# Altium PCB heartbeatPCB.PcbDoc
Units mil, origin at the board's own origin, x right, y up, seen from the top; angles counter-clockwise.
Board outline 3937.01 x 1151.1 mil, 2 copper layers (Top Layer, Bottom Layer); 36 components, 21 nets, 97 pads, 8 vias.
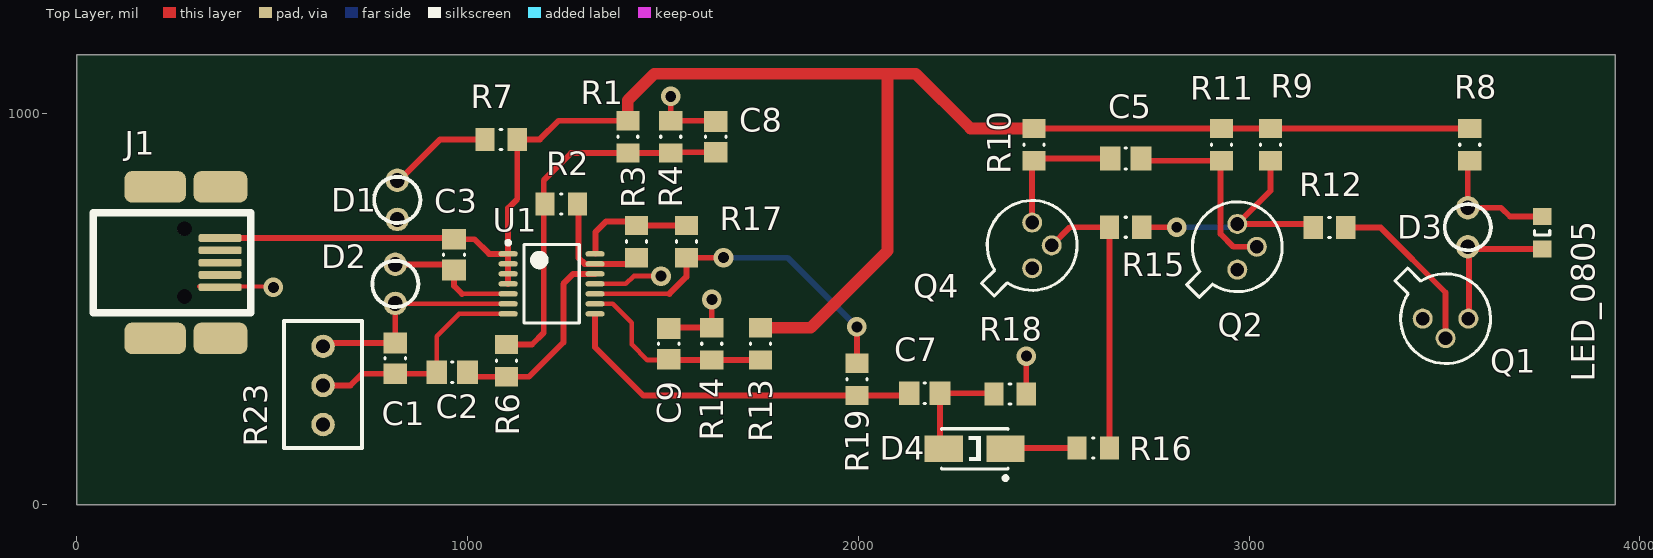
[diagram p0: Top Layer view]
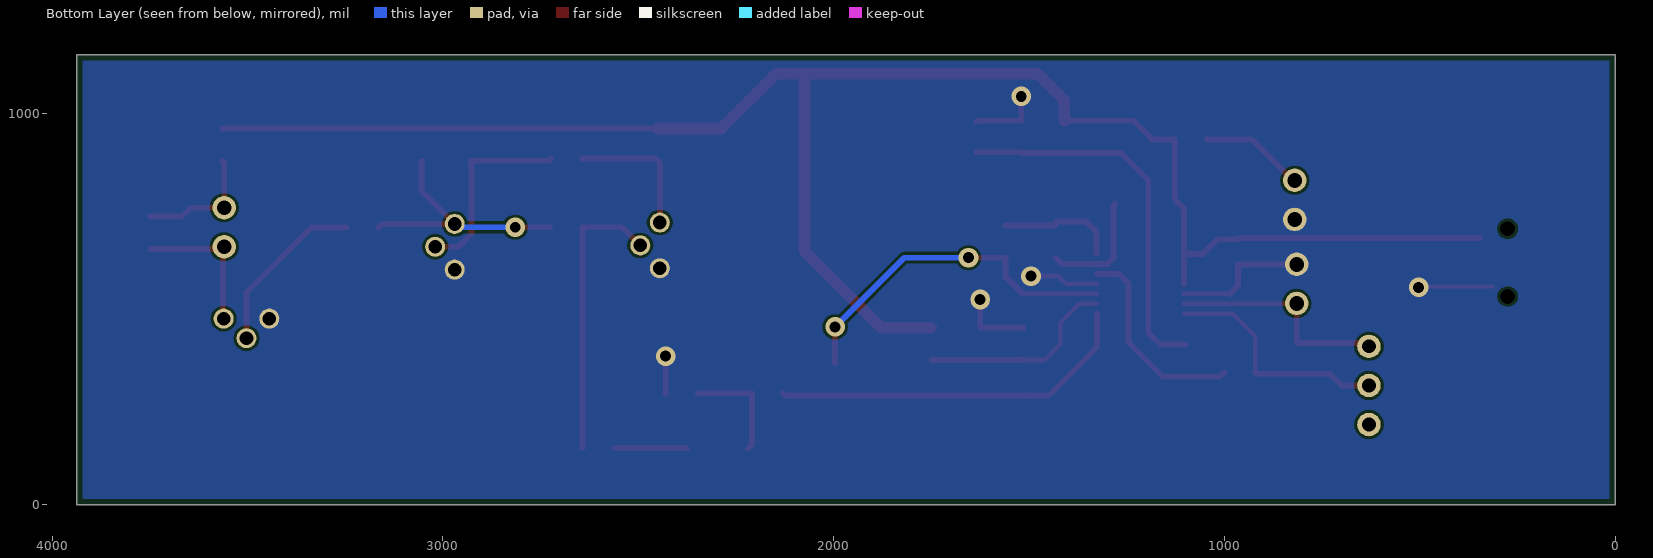
[diagram p1: Bottom Layer view, seen from below]

## Layer stack, top to bottom
Top Solder: solder mask 0.4, Solder Resist, Dk 3.5
Top Layer: signal copper 1.4
Dielectric 1: dielectric 12.6, FR-4, Dk 4.8
Bottom Layer: signal copper 1.4
Bottom Solder: solder mask 0.4, Solder Resist, Dk 3.5

## Board outline
0,0 3937.01,0 3937.01,1151.1 0,1151.1

## Design rules (kind name [scope] priority, off if disabled: settings)
AcuteAngle [All] p1: minimum=6.00000000000000E+0001 checktracksonly=FALSE
BoardOutlineClearance [All] p1: gap=15
Clearance [All] p1: gap=7
PolygonConnect [All] p1: connectstyle=Direct reliefconductorwidth=10 reliefentries=4 polygonreliefangle="90 Angle" airgapwidth=10
RoutingVias [All] p1: holewidth=28 width=50 viastyle="Through Hole" minholewidth=28 minwidth=50 maxholewidth=28 maxwidth=50
SolderMaskExpansion [All] p1: expansion=4
Width [InNet('5V')] p1: maxlimit=80 minlimit=10 preferedwidth=30
30 further rules are at their usual default settings.

## Classes and differential pairs
component class Sheet2: C5 C7 C9 D3 D4 LED_0805 Q1 Q2 Q4 R8 R9 R10 R11 R12 R13 R14 R15 R16 R17 R18 R19
component class Sheet1: C1 C2 C3 C8 D1 D2 J1 R1 R2 R3 R4 R6 R7 R23 U1

## Components (designator, comment, footprint, x,y, rotation, side; value= is the part's Value field where it differs from the comment)
C1 "50 nF" CAPC0805(2012)75_M 815,374.37 r90 top
C2 "2 uF" CAPC0805(2012)75_M 960.63,338.94 r180 top
C3 "CAP 0.5pF 50V 0805(2012)" CAPC0805(2012)75_M 965,640 r90 top
C5 "2 uF" CAPC0805(2012)75_M 2684.37,885.91 r180 top
C7 "2 uF" CAPC0805(2012)75_M 2169.69,285 r0 top
C8 "CAP 0.5pF 50V 0805(2012)" CAPC0805(2012)75_M 1635,941.34 r270 top
C9 "CAP 0.5pF 50V 0805(2012)" CAPC0805(2012)75_M 1514.97,411.63 r270 top
D1 "photodiode" 3mm_diode 820,830 r270 top
D2 "photodiode" 3mm_diode 815,615 r270 top
D3 "5mm_LED" 3mm_diode 3560,760 r270 top
D4 "" DIOD-S1M-13-F-SMA-2_V 2298,143 r0 top
J1 "67503-1020" MOLX-67503-1020_V 366.53,682.38 r0 top
LED_0805 "150080BS75000" 0805_A 3750,695.88 r90 top
Q1 "2N2222" MLTC-TO-18-3 3503,476 r0 top
Q2 "2N2222" MLTC-TO-18-3 2970,660 r90 top
Q4 "2N2222" MLTC-TO-18-3 2445,663.46 r90 top
R1 "? oHm" RESC0805(2012)_M 1410,941.34 r90 top
R2 "? Ohm" RESC0805(2012)_M 1239.66,769 r0 top
R3 "? Ohm" RESC0805(2012)_M 1432,673.34 r90 top
R4 "? Ohm" RESC0805(2012)_M 1520,941.34 r270 top
R6 "? Ohm" RESC0805(2012)_M 1100,368.66 r90 top
R7 "4R3 5% 0805(2012)" RESC0805(2012)_M 1085.63,935 r0 top
R8 "? Ohm" RESC0805(2012)_M 3565,921.34 r270 top
R9 "? Ohm" RESC0805(2012)_M 3055,921.34 r270 top
R10 "? Ohm" RESC0805(2012)_M 2450,921.34 r270 top
R11 "? Ohm" RESC0805(2012)_M 2930,921.34 r270 top
R12 "? Ohm" RESC0805(2012)_M 3206,709 r0 top
R13 "? Ohm" RESC0805(2012)_M 1749.97,411.63 r90 top
R14 "? Ohm" RESC0805(2012)_M 1624.97,411.63 r90 top
R15 "? Ohm" RESC0805(2012)_M 2684.37,710 r0 top
R16 "? Ohm" RESC0805(2012)_M 2601.34,145 r0 top
R17 "? Ohm" RESC0805(2012)_M 1560,673.34 r90 top
R18 "" RESC0805(2012)_M 2388.35,283.03 r0 top
R19 "? Ohm" RESC0805(2012)_M 1996.22,320.43 r90 top
R23 "5Mohm Potentiometer" 5k_pot 630,405 r270 top
U1 "ADA4891-3ARUZ-R7" ADI-RU-14_L 1215,565 r0 top

## Footprints (in the part's own frame and the unit in brackets; to place one, negate y for a bottom-side part, rotate by r counter-clockwise, add the part's x,y. Pads: shape width x height; smd on the part's side, far side on the other; paste and mask are expansions set on the pad)
3mm_diode [mil]
  round 60 hole 38: 1(0,0) 2(100,0)
  silkscreen extent -9,-59 109,59
5k_pot [mil] "3296W-1-505LF"
  round 60 hole 35: 1(0,0) 2(100,0) 3(200,0)
  silkscreen extent -65,-100 260,100
0805_A [mm] "Chip LED, 2-Leads, Body 2.0x1.3mm, IPC Medium Density"
  rect 1.1x1.2 smd: 1(-1.05,0) 2(1.05,0)
  silkscreen extent -0.15,-0.5 0.15,0.5, body extent -1,-0.62 1,0.63, height 0.68
ADI-RU-14_L [mm] "SOP, 14-Leads, Body 5x4.4mm, Pitch 0.65mm, IPC High Density"
  oval 1.25x0.35 smd: 1(-2.825,1.95) 2(-2.825,1.3) 3(-2.825,0.65) 4(-2.825,0) 5(-2.825,-0.65) 6(-2.825,-1.3) 7(-2.825,-1.95) 8(2.825,-1.95) 9(2.825,-1.3) 10(2.825,-0.65) 11(2.825,0) 12(2.825,0.65) 13(2.825,1.3) 14(2.825,1.95)
  silkscreen extent -2.95,-2.55 1.8,2.8, body extent -2.25,-2.55 2.25,2.55, height 1.2
CAPC0805(2012)75_M [mm] "Chip Capacitor, Body 2.0x1.2mm, Height 0.75mm, IPC Low Density"
  rect 1.35x1.55 smd: 1(-1,0) 2(1,0)
  silkscreen extent -0.05,-0.67 0.05,0.67, body extent -1.1,-0.72 1.1,0.72, height 0.75
DIOD-S1M-13-F-SMA-2_V [mm] "SMD, 2-Leads, Body 4.3x2.605mm, Height 2.3mm"
  rect 2.5x1.7 smd: 1(-2,0) 2(2,0)
  silkscreen extent -2.15,-2.03 2.15,1.3, body extent -2.15,-1.3 2.15,1.3, height 2.3
MLTC-TO-18-3 [mm] "TO-18, 3-Leads"
  round 1.3 hole 0.889: 1(-1.485,0) 2(0,-1.27) 3(1.485,0)
  silkscreen extent -3.29,-2.92 2.92,3.29, body extent -3.29,-2.93 2.93,3.29, height 5.33
MOLX-67503-1020_V [mm] "Mini USB Connector, SMT, Righer Angle"
  rrect50% 2.8x0.5 smd: 1(0,0) 2(0,-0.8) 3(0,-1.6) 4(0,-2.4) 5(0,-3.2)
  rrect50% 3.5x2.05 smd: 6(0.025,3.325) 8(0.025,-6.525)
  rrect50% 4x2.05 smd: 7(-4.225,3.325) 9(-4.225,-6.525)
  round 0.9 hole 0.965 unplated: X(-2.325,-3.8) Y(-2.325,0.6)
  silkscreen extent -8.25,-4.85 2,1.65, body extent -8.22,-6.56 0.78,3.34, height 3.95
RESC0805(2012)_M [mm] "Chip Resistor, Body 2.0x1.3mm, IPC Low Density"
  rect 1.25x1.5 smd: 1(-1.05,0) 2(1.05,0)
  silkscreen extent -0.05,-0.65 0.05,0.65, body extent -1.1,-0.67 1.1,0.67, height 0.7

## Part data
C1 C2 C3 C5 C7 C8 C9: library part CMP-1036-00018-1, "CAP 0.5pF 50V ±0.1pF 0805 (2012 Metric) Thickness 0.75mm SMD"
D4: library part CMP-0639-00001-1, "Surface Mount Glass Passivated Rectifier, 1000V, 1 A, -65 to 125 degC, 2-Pin SMA Package, RoHS, Tape and Reel"
J1: library part CMP-0411-00002-1, "USB, MINI, SMD, RA KME04-USBMU03A01"
LED_0805: library part CMP-1426-00008-1, "SMD mono-color Chip LED, WL-SMCW, Blue"
Q1 Q2 Q4: library part CMP-2000-05237-1, "Low Power Bipolar NPN Transistor, 30 V, -65 to 200 degC, 3-Pin TO-18, RoHS, Bulk"
R1 R2 R3 R4 R6 R7 R8 R9 R10 R11 R12 R13 R14 R15 R16 R17 R18 R19: library part CMP-1013-00017-1, "4R3 0.125W 5% 0805 (2012 Metric)  SMD"
R23: "3296W-1-505LF"
U1: library part CMP-0384-01869-1, "3 Channel Single-Supply Operation Operational Amplifier, 220 MHz BW, 170 V/us SR, Industrial, 14-pin SOP (RU-14), Reel"

## Via types
v1: diameter 50, hole 28, Top Layer to Bottom Layer, 8 vias

## Nets (pads, with @x,y where several pads share a name; then routed paths per layer and width w, separated by ;. In a path a pad name is that pad's centre, name@x,y a point inside that pad or via, vN(x,y) a via of type N, cw(c..) or ccw(c..) an arc to the next point about the centre after c; other vN are vias at no path point)
5V: C3.2 J1.1 R1.2 R7.2 R8.1 R9.1 R10.1 R11.1 R13.2 U1.1 U1.2 U1.3 U1.4 | length 4611.8
  Top Layer w15: J1.1@345,682.5 960.72,682.5 C3.2@965,678.22 ; C3.2 1017.63,679.37 1055.23,641.77 U1.1 ; U1.4 U1.3 U1.2 U1.1 ; R1.2 1232.68,982.68 1185,935 R7.2 1126.97,781.97 1103.78,758.78 U1.1 ; R10.1 R11.1 R9.1 R8.1
  Top Layer w30: R1.2 1410,1035 1478,1103 2075,1103 ; R13.2 1877.97,452.97 2075,650 2075,1103 ; R10.1 2287.32,962.68 2147,1103 2075,1103
GND: C3.1 C8.1 C9.1 D1.2 D2.1 J1.5 Q1.1 Q2.1 Q4.1 R4.1 R14.2 R18.2 U1.5 U1.11 | length 1180.5
  Top Layer w10: J1.5@312,558.01 500.99,558.01 v1(503,556)
  Top Layer w12: 985.59,539.41 U1.5 ; U1.11 1405,565 1425,585 v1(1495,585)
  Top Layer w15: D2.1 965,615 C3.1 965,560 985.59,539.41 ; C9.1 1514.97,452.97 R14.2 v1(1625,525) ; v1(1520,1045) R4.1 1633.03,982.68 C8.1 ; R18.2 2429.69,379.69 v1(2430,380)
NetC1_1: C1.1 C2.2 R23.2 U1.7 | length 603.8
  Top Layer w12: C2.2 921.26,431.26 978.23,488.23 U1.7
  Top Layer w15: R23.2 700,305 730,335 C1.1 917.32,335 C2.2
NetC1_2: C1.2 D2.2 R23.1 U1.6 | length 579.1
  Top Layer w12: D2.2@816.18,513.82 U1.6
  Top Layer w15: R23.1 638.74,413.74 C1.2 D2.2 D2.2@816.18,513.82
NetC2_1: C2.1 R6.1 U1.12 | length 527.9
  Top Layer w15: C2.1 1011.61,327.32 R6.1 1157.32,327.32 1245,415 1245,565 1270.59,590.59 U1.12
NetC5_1: C5.1 Q2.2 R11.2 | length 502.4
  Top Layer w15: C5.1 2729.65,880 R11.2@2926.91,880 ; R11.2 R11.2@2926.91,880 ; Q2.2 2960,660 2926.91,693.09 R11.2@2926.91,880
NetC5_2: C5.2 Q4.3 R10.2 | length 357.6
  Top Layer w15: Q4.3 2445,875 R10.2 2455.91,885.91 C5.2
NetC7_1: C7.1 R19.1 U1.8 | length 944.6
  Top Layer w15: U1.8 1326.22,402.78 1449.91,279.09 1509,279.09 ; 1510,278.09 1509,279.09 ; C7.1 2124.41,279.09 R19.1 1509,279.09
NetC7_2: C7.2 D4.1 R18.1 | length 285
  Top Layer w15: D4.1 2209.06,153.2 C7.2 2345.04,285 R18.1
NetC8_2: C8.2 R1.1 R2.1 R4.2 R6.2 | length 967.2
  Top Layer w15: R6.2 1165,410 1195,440 1195,830 1265,900 R1.1 R4.2 1521.97,901.97 C8.2
NetC9_2: C9.2 R13.1 R14.1 U1.9 | length 521.4
  Top Layer w12: U1.9 1371.18,513.82 1420,465 1420,410 1460,370 C9.2@1520,370
  Top Layer w15: C9.2 1516.94,370.29 R14.1 R13.1
NetD1_1: D1.1 R7.1 | length 269.9
  Top Layer w15: D1.1@820,825 930,935 R7.1
NetD3_1: D3.1 LED_0805.2 R8.2 | length 321.5
  Top Layer w15: R8.2 3560,875 D3.1 3645,760 3667.78,737.22 LED_0805.2
NetD3_2: D3.2 LED_0805.1 Q1.3 | length 372.8
  Top Layer w15: D3.2 D3.2@3563,657 ; Q1.3@3563,476.46 D3.2@3563,657 ; LED_0805.1 3565.46,654.54 D3.2@3563,657
NetD4_2: D4.2 R16.1 | length 184.1
  Top Layer w15: D4.2 2378.74,145 R16.1
NetQ1_2: Q1.2 R12.2 | length 441.4
  Top Layer w15: R12.2 3337,709 3503,543 Q1.2
NetQ2_3: Q2.3 R9.2 R12.1 R15.2 | length 655.1
  Top Layer w15: R15.2 v1(2815,710) ; Q2.3@2961.54,710 Q2.3 ; R9.2 3055,803.46 Q2.3 ; R12.1 3155.2,718.46 Q2.3
  Bottom Layer w15: v1(2815,710) 2961.54,710 Q2.3
NetQ4_2: Q4.2 R15.1 R16.2 | length 732.5
  Top Layer w15: Q4.2 2541.54,710 R15.1 2643.03,476.97 2642.68,476.61 R16.2
NetR2_2: R2.2 R3.1 U1.13 | length 299.9
  Top Layer w15: R2.2@1280,769 1284.11,764.89 1284.11,631.67 1299.6,616.18 U1.13 1416.18,616.18 R3.1
NetR3_2: R3.2 R17.2 U1.14 | length 297.1
  Top Layer w15: U1.14@1327,642.5 1327,697 1355,725 R3.2@1430,725 ; R3.2 R17.2
NetR17_1: R17.1 R19.2 U1.10 | length 918.4
  Top Layer w12: U1.10 1516.41,539.41
  Top Layer w15: 1516.41,539.41 1560,583 R17.1 v1(1655,632) ; R19.2 v1(1996.22,455) v1@1996.22,469.78
  Bottom Layer w15: v1(1655,632) 1819.22,632 v1(1996.22,455)
pads on no net: J1.2 J1.3 J1.4 J1.6 J1.7 J1.8 J1.9 J1.X J1.Y R23.3

## Polygon pours and split planes (outlines as drawn)
GND on Bottom Layer "ground" (solid, pour order 0): -195,1270 -195,1280 4195,1280 4195,-370 3825,-370 3825,-205 -145,-205

## Silkscreen, mask and mechanical layers (free items; w line width, h text height)
Mechanical 1:
  lines w10: 0,0 0,1151.1 3937.01,1151.1 3937.01,0 20,0 0,0